# Altium PCB 400432.PcbDoc (part 5 of 7)
Units mm, origin at the board's own origin, x right, y up, seen from the top; angles counter-clockwise.
Board outline 136.53 x 63.5 mm, 4 copper layers (Top Layer, Mid-Layer 1, Mid-Layer 2, Bottom Layer), stack 1.505 mm thick; 354 components, 245 nets, 1470 pads, 1957 vias.
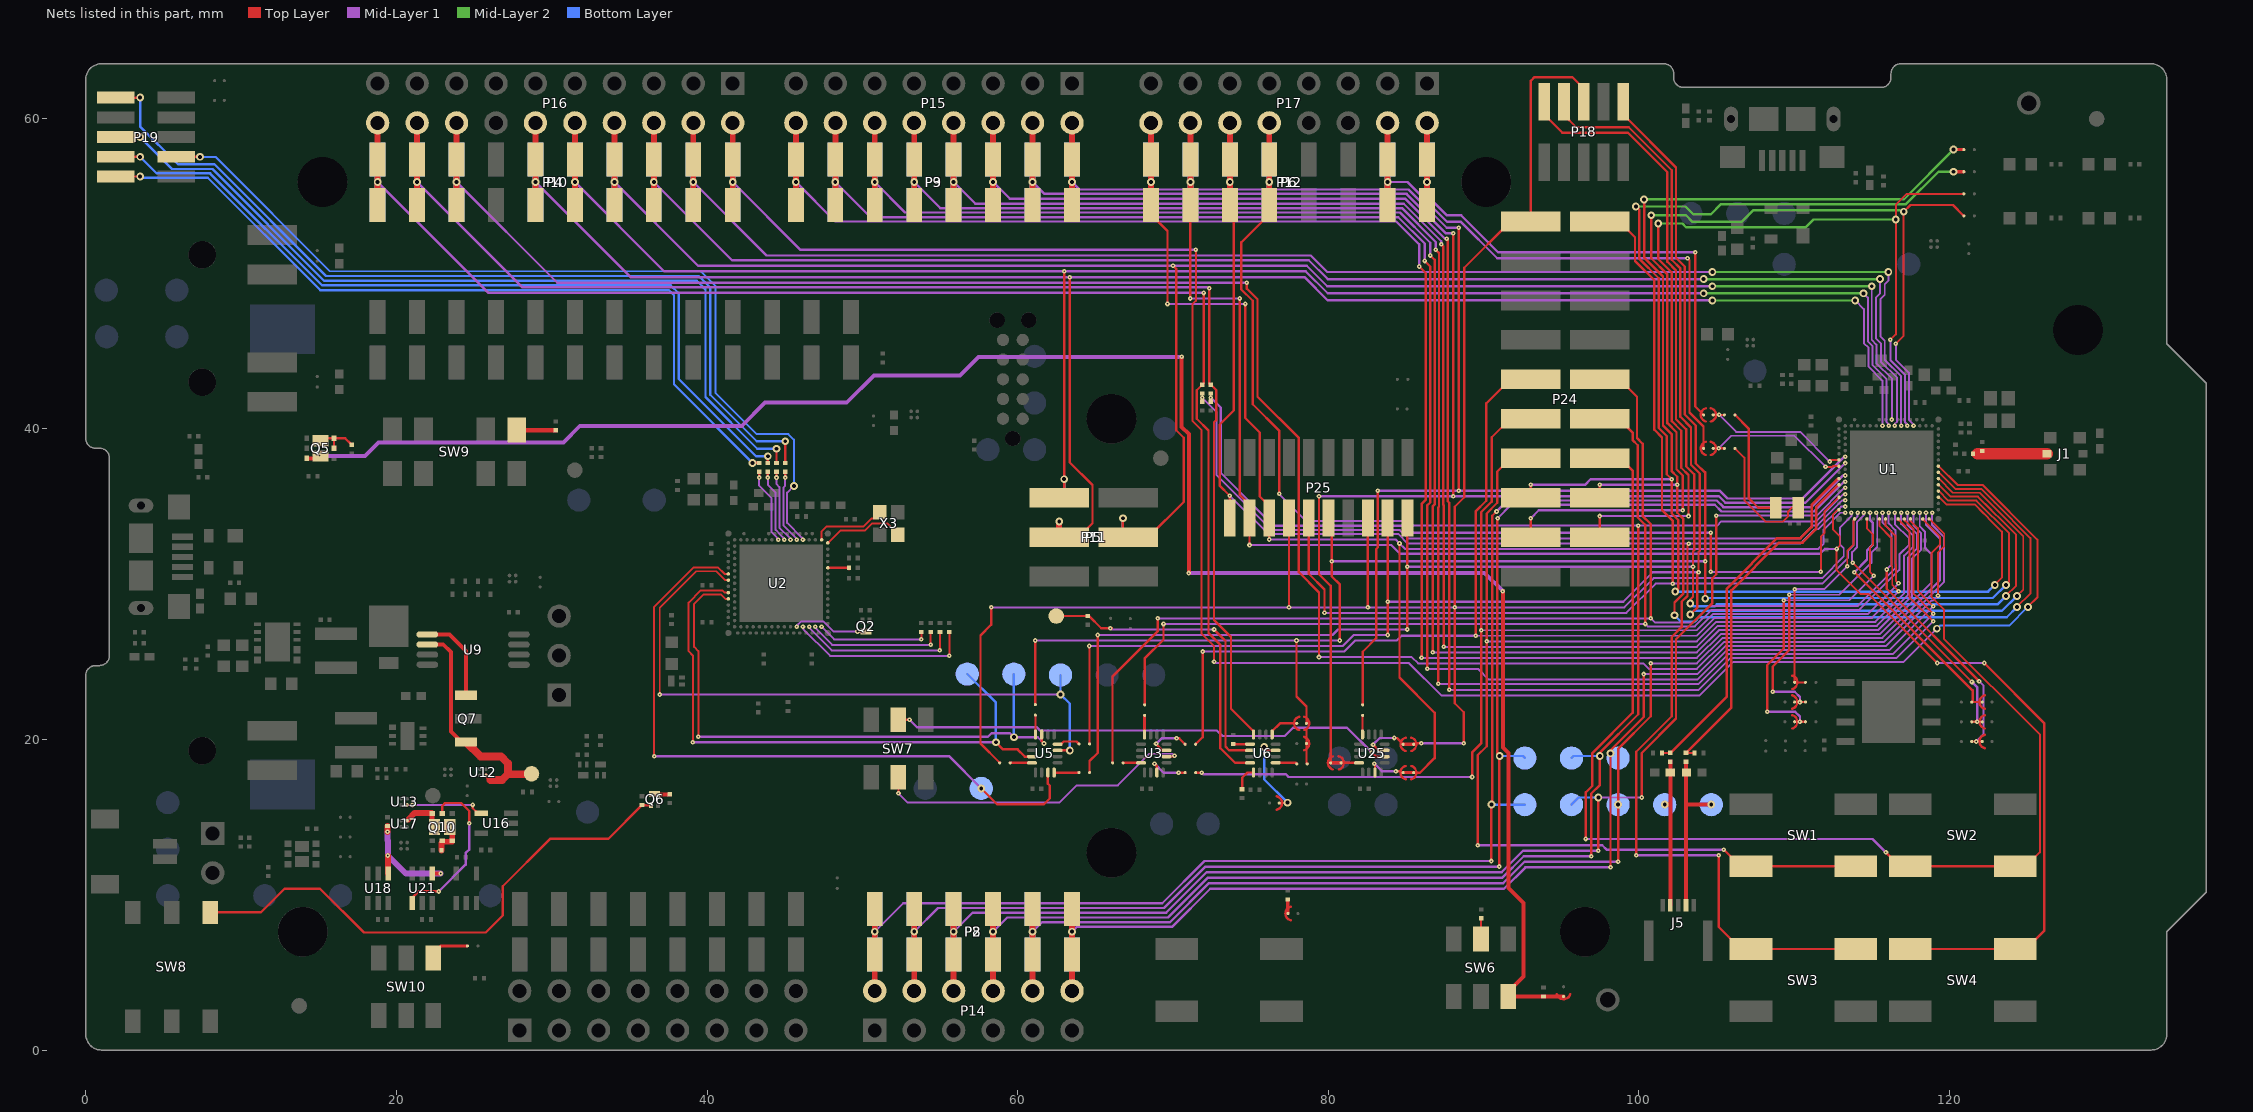
[diagram p6: the nets of this part, all layers, seen from the top]

## Via types
v1: diameter 0.5, hole 0.25, Top Layer to Bottom Layer, tented both sides, 1453 vias
v2: diameter 0.3, hole 0.1, Top Layer to Mid-Layer 1, tented top, 392 vias
v3: diameter 0.3, hole 0.1, Top Layer to Mid-Layer 1, tented both sides, 68 vias
v4: diameter 0.61, hole 0.305, Top Layer to Bottom Layer, tented both sides, 44 vias

## Nets (pads, with @x,y where several pads share a name; then routed paths per layer and width w, separated by ;. In a path a pad name is that pad's centre, name@x,y a point inside that pad or via, vN(x,y) a via of type N, cw(c..) or ccw(c..) an arc to the next point about the centre after c; other vN are vias at no path point) (continued)
NetQ5_3: Q5.3 R50.1 SB31.2 SW6.3 | length 124.5
  Top Layer w0.254: Q5.3@14.238,38.085 14.742,38.085 14.91,38.252 v2(15.062,38.252) ; v2(70.561,44.628) 70.561,40.107 71.018,39.649 v3(71.018,30.709) ; v3(91.237,29.54) 91.237,19.482 91.592,19.126 91.592,10.439 92.558,9.474 92.558,4.724 91.579,3.746 SW6.3@91.579,3.449 ; SW6.3@91.579,3.44 SW6.3@91.579,3.449 ; SB31.2@95.148,3.447 95.146,3.449 94.794,3.449 R50.1@93.853,3.449 SW6.3@91.579,3.449
  Mid-Layer 1 w0.254: v2(15.062,38.252) 17.983,38.252 18.847,39.116 30.759,39.116 31.833,40.189 42.247,40.189 43.739,41.681 48.997,41.681 50.749,43.434 56.286,43.434 57.48,44.628 v2(70.561,44.628) ; v3(71.018,30.709) 90.068,30.709 v3(91.237,29.54)
NetQ5_5: Q5.5 Q5.6 R51.2 | length 3
  Top Layer w0.152: Q5.6@15.113,39.21 15.288,39.385 Q5.6@15.988,39.385 Q5.6@16.058,39.385 ; Q5.5@16.063,38.735 15.988,38.81 15.988,39.31 16.063,39.385 16.704,39.385 17.046,39.043 17.046,39.028 17.105,38.969 R51.2@17.12,38.969
NetQ6_1: Q6.1 R61.1 SW8.4 | length 34.7
  Top Layer w0.152: SW8.4@8.028,8.859 11.272,8.859 12.802,10.389 15.088,10.389 17.907,7.569 25.756,7.569 26.851,8.664 26.851,10.544 29.901,13.595 33.641,13.595 R61.1@35.814,15.768 36.391,15.768 Q6.1@36.402,15.779
NetQ6_3: Q6.3 R58.2 | length 1
  Top Layer w0.254: Q6.3@36.627,16.479 36.641,16.465 R58.2@37.592,16.465
NetQ7_1: Q7.1 U9.1 | length 5.6
  Top Layer w0.254: U9.1@22.196,26.756 23.434,26.756 24.489,25.701 Q7.1@24.489,22.836
NetQ7_3: Q7.3 TP34.1 U9.2 U12.A1 | length 15
  Top Layer w0.25: U12.A1@25.778,17.682 26.065,17.394
  Top Layer w0.254: U9.2@22.196,26.106 23.018,26.106 23.51,25.614 23.51,20.509 24.182,19.836 Q7.3@24.489,19.836
  Top Layer w0.508: Q7.3@24.489,19.836 25.427,18.898 26.746,18.898 27.178,18.466 27.178,17.755 ; 26.065,17.394 26.818,17.394 27.178,17.755 ; TP34.1@28.651,17.856 28.55,17.755 27.178,17.755
NetQ10_2: Q10.2 U21.4 | length 10.6
  Top Layer w0.152: U21.4@21.016,9.464 21.016,9.789 21.438,10.211 v2(22.733,10.211) ; Q10.2@22.951,15.301 22.951,15.712 23.139,15.9 24.181,15.9 24.689,15.392 v2(24.689,14.605)
  Mid-Layer 1 w0.152: v2(22.733,10.211) 24.46,11.938 24.46,12.675 24.689,12.903 v2(24.689,14.605)
NetQ10_3: Q10.3 U17.A2 | length 2.7
  Top Layer w0.305: Q10.3@22.301,15.301 22.301,14.531 Q10.3@22.476,14.356
  Top Layer w0.381: U17.A2@20.764,14.846 21.184,15.265 Q10.3@22.265,15.265
NetQ10_5: Q10.5 Q10.6 R72.2 | length 2.2
  Top Layer w0.381: R72.2@22.916,12.852 22.916,13.315 23.012,13.411 23.601,13.411 Q10.6@23.601,13.481 23.601,14.181 Q10.6@23.426,14.356
NetR11_1: R11.1 U2.L31 | length 1.4
  Top Layer w0.152: U2.L31@47.776,31.048 49.055,31.048 R11.1@49.141,30.963
NetR44_2: R44.2 SW6.5 | length 1.3
  Top Layer w0.152: SW6.5@89.829,7.14 89.829,8.467 R44.2@89.84,8.478
NetR47_1: R47.1 SB26.2 | length 0.9
  Top Layer w0.203: SB26.2@77.386,8.788 77.386,9.639 R47.1@77.394,9.646
NetR48_2: R48.2 U6.9 | length 1.1
  Top Layer w0.152: R48.2@73.889,19.705 73.902,19.691 U6.9@74.96,19.691
NetR49_2: R49.2 U6.13 | length 1.6
  Top Layer w0.152: R49.2@74.447,16.846 74.447,17.526 74.788,17.866 U6.13@75.185,17.866
NetR57_1: R57.1 SB33.2 TP19.1 U6.10 | length 20.2
  Top Layer w0.152: TP19.1@62.484,27.94 R57.1@64.592,27.94 ; R57.1@64.516,27.946 64.587,27.946 R57.1@64.592,27.94 ; SB33.2@66.046,27.153 v2(65.97,27.153) 65.38,27.153 R57.1@64.592,27.94 ; v2@72.644,27.127 v2(72.644,27.076) 73.381,26.34 73.381,19.533 73.622,19.291 U6.10@74.96,19.291
  Mid-Layer 1 w0.152: v2@66.046,27.153 66.048,27.153 v2@66.073,27.127 ; v2@66.073,27.076 v2(72.644,27.076)
NetR71_2: R71.2 U18.1 U21.1 | length 7.5
  Top Layer w0.254: v2(19.456,12.522) v2@19.471,12.507 ; U21.1@22.316,11.364 v2(22.85,11.364)
  Top Layer w0.381: v2(19.431,14.046) R71.2@19.431,14.422 ; U18.1@19.471,11.364 v2@19.471,12.507
  Mid-Layer 1 w0.381: v2(19.431,14.046) 19.431,13.502 19.456,13.476 v2(19.456,12.522) 20.615,11.364 v2(22.85,11.364)
NetR78_2: R78.2 SW9.8 | length 2.5
  Top Layer w0.305: SW9.8@27.749,39.906 27.758,39.898 R78.2@30.251,39.898
NetSB1_1: SB1.1 X2.1 | length 7.7
  Top Layer w0.152: SB1.1@106.18,40.894 107.061,40.013 107.061,35.535 107.682,34.914 X2.1@108.803,34.914
NetSB2_1: SB2.1 X2.2 | length 8.2
  Top Layer w0.125: SB2.1@106.18,38.735 106.782,38.133 106.782,35.382 108.153,34.011 109.245,34.011 109.601,34.366 109.601,34.671 109.844,34.914 X2.2@110.253,34.914
NetSB27_2: SB27.2 U25.15 | length 2.7
  Top Layer w0.152: v3(82.956,18.44) 83.004,18.393 U25.15@83.004,17.866 ; v3(84.353,17.958) 84.645,17.958 84.655,17.948 84.747,17.856 SB27.2@84.82,17.856
  Mid-Layer 1 w0.152: v3(82.956,18.44) 83.439,17.958 v3(84.353,17.958)
NetSB28_2: SB28.2 U25.3 | length 3.2
  Top Layer w0.152: v3(82.88,19.66) 83.249,19.291 U25.3@83.629,19.291 ; v3(84.252,20.091) 84.414,20.091 84.671,19.834 SB28.2@84.82,19.685
  Mid-Layer 1 w0.152: v3(82.88,19.66) 83.312,20.091 v3(84.252,20.091)
NetSB29_2: SB29.2 U25.8 | length 1.2
  Top Layer w0.152: U25.8@82.204,20.316 82.204,21.542 SB29.2@82.211,21.549
NetSB30_2: SB30.2 U25.12 | length 1.2
  Top Layer w0.152: SB30.2@80.822,18.491 80.996,18.491 U25.12@81.979,18.491
NetSB42_1: SB42.1 U6.1 | length 1.4
  Top Layer w0.152: U6.1@76.61,18.491 77.801,18.491 77.903,18.491 SB42.1@77.97,18.423
NetSB45_1: SB45.1 U6.5 | length 2
  Top Layer w0.152: U6.5@76.385,20.316 76.385,20.531 76.886,21.031 77.796,21.031 SB45.1@77.97,21.031
NetSB46_1: SB46.1 U6.3 | length 5.6
  Top Layer w0.152: v1(75.87,19.507) 76.086,19.291 U6.3@76.61,19.291 ; SB46.1@76.843,15.9 77.343,15.9 v1(77.368,15.926)
  Bottom Layer w0.152: v1(75.87,19.507) 75.87,17.424 v1(77.368,15.926)
NetSB50_2: SB50.2 U3.15 | length 2.9
  Top Layer w0.152: v3(68.809,18.44) 68.966,18.283 U3.15@68.966,17.866 ; v3(70.358,17.856) SB50.2@70.782,17.856 SB50.2@70.772,17.866
  Mid-Layer 1 w0.152: v3(68.809,18.44) 69.393,17.856 v3(70.358,17.856)
NetSB51_2: SB51.2 U3.3 | length 3
  Top Layer w0.152: v3(68.91,19.71) 69.329,19.291 U3.3@69.591,19.291 ; v3(70.231,20.066) 70.401,20.066 SB51.2@70.782,19.685
  Mid-Layer 1 w0.152: v3(68.91,19.71) 69.266,20.066 v3(70.231,20.066)
NetSB52_2: SB52.2 U3.8 | length 1.2
  Top Layer w0.203: U3.8@68.166,20.316 SB52.2@68.166,21.506
NetSB53_2: SB53.2 U3.12 | length 1.2
  Top Layer w0.152: SB53.2@66.784,18.491 U3.12@67.941,18.491
NetSB54_2: SB54.2 U5.16 | length 1.6
  Top Layer w0.152: U5.16@62.347,17.866 62.357,17.856 SB54.2@63.95,17.856
NetSB55_2: SB55.2 U5.4 | length 1.5
  Top Layer w0.152: U5.4@62.572,19.691 62.795,19.691 62.967,19.863 63.797,19.863 SB55.2@63.95,19.71
NetSB56_2: SB56.2 U5.8 | length 1.2
  Top Layer w0.152: SB56.2@61.138,21.557 61.147,21.547 U5.8@61.147,20.316
NetSB57_2: SB57.2 U5.12 | length 1.4
  Top Layer w0.152: SB57.2@59.52,18.491 U5.12@60.922,18.491
NetSB58_2: SB58.2 SW10.1 | length 2.7
  Top Layer w0.203: SW10.1@22.375,5.914 22.375,6.195 22.885,6.706 SB58.2@24.58,6.706
NetU2_B30: U2.B30 X3.3 | length 4.6
  Top Layer w0.125: U2.B30@47.376,32.848 47.376,33.396 47.678,33.698 50.072,33.698 50.606,34.232 50.764,34.232 X3.3@51.011,34.48
NetU2_C31: U2.C31 X3.1 | length 5.3
  Top Layer w0.125: U2.C31@47.776,32.648 47.8,32.648 48.588,33.436 50.164,33.436 50.614,33.886 51.635,33.886 52.276,33.245 X3.1@52.276,33.178
NetU13_B2: U13.B2 U16.4 | length 5.1
  Top Layer w0.152: U13.B2@20.698,15.777 v2(21.034,15.777) ; v2(24.917,15.777) 24.917,15.57 25.233,15.255 U16.4@25.466,15.255
  Mid-Layer 1 w0.152: v2(21.034,15.777) v2(24.917,15.777)
NFC1: C43.1 J5.2 R43.1 TP17.1 | length 9.6
  Top Layer w0.25: v1(101.656,15.799) 101.973,15.799 102.024,15.748 ; J5.2@102.024,9.328 102.024,15.748 ; R43.1@102.022,18.563 102.024,15.748
NFC2: C44.2 J5.4 R46.1 TP18.1 | length 10.9
  Top Layer w0.25: J5.4@103.024,9.328 103.024,15.748 ; R46.1@103.024,18.567 103.024,15.748 ; v1(104.656,15.799) 103.075,15.799 103.024,15.748
P0.00: P6.1 P12.1 P17.2 SB3.2 | length 38.5
  Top Layer w0.152: v2(103.624,51.351) 103.624,41.427 104.009,41.043 SB3.2@104.158,40.894
  Top Layer w0.381: P6.1@86.36,54.415 v1(86.36,55.88) P6.1@86.36,57.345 P17.2@86.36,59.69
  Mid-Layer 1 w0.152: v1(86.36,55.88) 86.36,55.016 87.643,53.734 88.557,53.734 90.94,51.351 v2(103.624,51.351)
  Bottom Layer w0.381: P12.1@86.36,54.415 v1(86.36,55.88) P12.1@86.36,57.345
P0.00/XL1: SB1.2 SB3.1 U1.N1 | length 9.7
  Top Layer w0.125: SB3.1@104.783,40.894 104.957,40.894 v2(105.156,40.894) SB1.2@105.504,40.894 ; v2(112.293,37.887) 112.395,37.989 U1.N1@112.878,37.989
  Mid-Layer 1 w0.125: v2(105.156,40.894) 106.248,39.802 110.379,39.802 v2(112.293,37.887)
P0.01: P6.2 P12.2 P17.4 SB4.2 | length 42.2
  Top Layer w0.152: v2(103.124,50.978) 103.251,50.851 103.251,41.046 104.158,40.14 104.158,39.088 SB4.2@104.158,38.735
  Top Layer w0.381: P6.2@83.82,54.415 v1(83.82,55.88) P6.2@83.82,57.345 P17.4@83.82,59.69
  Mid-Layer 1 w0.152: v1(83.82,55.88) 85.09,55.88 87.655,53.315 88.544,53.315 90.881,50.978 v2(103.124,50.978)
  Bottom Layer w0.381: P12.2@83.82,54.415 v1(83.82,55.88) P12.2@83.82,57.345
P0.01/XL2: SB2.2 SB4.1 U1.R1 | length 9.7
  Top Layer w0.125: v2(112.014,37.541) 112.446,37.541 112.493,37.589 U1.R1@112.878,37.589
  Top Layer w0.152: SB4.1@104.783,38.735 104.957,38.735 v2(105.131,38.735) SB2.2@105.504,38.735
  Mid-Layer 1 w0.125: v2(105.131,38.735) 105.943,39.548 110.007,39.548 v2(112.014,37.541)
P0.02/NFC1: R42.2 R43.2 U1.W1 | length 23.6
  Top Layer w0.127: R42.2@101.479,19.126 R43.2@102.015,19.126
  Top Layer w0.165: R43.2@102.015,19.126 105.653,22.764 105.653,29.711 108.899,32.956 110.401,32.956 111.118,33.673 111.118,35.091 112.815,36.789 U1.W1@112.878,36.789
P0.03/NFC2: R45.2 R46.2 U1.AA1 | length 22.8
  Top Layer w0.152: R46.2@103.032,19.133 103.039,19.126 R45.2@103.576,19.126
  Top Layer w0.165: R46.2@103.032,19.133 105.943,22.045 105.943,29.591 109.019,32.666 110.543,32.666 111.408,33.531 111.408,34.971 112.825,36.389 U1.AA1@112.878,36.389
P0.04/AIN0: P2.1 P8.1 P14.2 TP42.1 U1.V2 | length 98.9
  Top Layer w0.152: v2(90.5,12.167) v1(90.5,15.799) 90.551,15.85 90.551,34.392 v2(90.83,34.671)
  Top Layer w0.381: P14.2@50.8,3.81 P2.1@50.8,6.155 v1(50.8,7.62) P2.1@50.8,9.085
  Mid-Layer 1 w0.152: v1(50.8,7.62) 52.629,9.449 69.303,9.449 72.021,12.167 v2(90.5,12.167) ; v2(90.83,34.671) 91.542,35.382 105.004,35.382 105.435,34.95 111.1,34.95 113.138,36.989 v2(113.278,36.989)
  Bottom Layer w0.152: v1(90.5,15.799) TP42.1@92.656,15.799
  Bottom Layer w0.381: P8.1@50.8,6.155 v1(50.8,7.62) P8.1@50.8,9.677
P0.05/AIN1: P2.2 P8.2 P14.4 TP43.1 U1.Y2 | length 95.5
  Top Layer w0.152: v2(90.907,34.239) 90.881,34.214 90.881,19.075 v1(91.031,18.926) ; v2(91.008,11.811) v1@91.008,18.903
  Top Layer w0.381: P14.4@53.34,3.81 P2.2@53.34,6.155 v1(53.34,7.62) P2.2@53.34,9.085
  Mid-Layer 1 w0.152: v1(53.34,7.62) 54.864,9.144 69.429,9.144 72.096,11.811 v2(91.008,11.811) ; v2@90.83,34.239 v2(90.907,34.239) 91.77,35.103 104.877,35.103 105.308,34.671 111.277,34.671 113.195,36.589 v2(113.278,36.589)
  Bottom Layer w0.152: v1(91.031,18.926) 92.529,18.926 TP43.1@92.656,18.799
  Bottom Layer w0.381: P8.2@53.34,6.155 v1(53.34,7.62) P8.2@53.34,9.085
P0.06/AIN2: P2.3 P8.3 P14.6 TP44.1 U1.AB2 | length 89.2
  Top Layer w0.152: v2(97.384,12.827) v1(97.384,16.256) ; v2(100.178,16.256) 100.178,19.126 102.387,21.336 102.387,26.441 104.724,28.778 104.724,30.378 104.978,30.632 v2(104.978,34.392)
  Top Layer w0.381: P14.6@55.88,3.81 P2.3@55.88,6.155 v1(55.88,7.62) P2.3@55.88,9.085
  Mid-Layer 1 w0.125: v2@104.978,34.403 111.441,34.403 113.227,36.189 v2(113.278,36.189)
  Mid-Layer 1 w0.152: v1(55.88,7.62) 57.099,8.839 69.555,8.839 72.172,11.455 91.161,11.455 92.532,12.827 v2(97.384,12.827) ; v1(97.384,16.256) v2(100.178,16.256)
  Bottom Layer w0.152: TP44.1@95.656,15.799 96.114,16.256 v1(97.384,16.256)
  Bottom Layer w0.381: P8.3@55.88,6.155 v1(55.88,7.62) P8.3@55.88,9.085
P0.07/AIN3: P2.4 P6.5 P8.4 P12.5 P14.8 P17.10 TP45.1 U1.AD2 | length 140.3
  Top Layer w0.152: P6.5@76.2,54.61 P6.5@76.2,54.415 76.2,53.797 74.397,51.994 74.397,48.971 75.133,48.235 75.133,41.58 76.835,39.878 v2(76.835,35.814) ; v2(96.926,12.471) 96.926,16.51 97.482,17.066 97.482,18.9 v1@97.508,18.926 ; v1@97.447,18.986 97.482,19.022 97.482,19.149 99.949,21.615 v2(99.949,33.757)
  Top Layer w0.381: P14.8@58.42,3.81 P2.4@58.42,6.155 v1(58.42,7.62) P2.4@58.42,9.085 ; P6.5@76.2,54.61 v1(76.2,55.88) P6.5@76.2,57.345 P17.10@76.2,59.69
  Mid-Layer 1 w0.125: v2(76.835,35.814) 76.835,35.789 78.562,34.061 84.861,34.061 85.166,33.757 v2(99.949,33.757) 105.029,33.757 105.308,34.036 111.401,34.036 v2@113.154,35.789
  Mid-Layer 1 w0.152: v1(58.42,7.62) 59.334,8.534 69.682,8.534 72.247,11.1 91.211,11.1 92.583,12.471 v2(96.926,12.471)
  Bottom Layer w0.152: TP45.1@95.656,18.799 95.783,18.926 v1(97.482,18.926) v1@97.508,18.926
  Bottom Layer w0.381: P8.4@58.42,6.155 v1(58.42,7.62) P8.4@58.42,9.652 ; P12.5@76.2,54.415 v1(76.2,55.88) P12.5@76.2,57.345
  other v2: 113.278,35.789
P0.08/TRACEDATA3: P6.6 P12.6 P17.12 P25.20 SW3.2 U1.AH2 | length 111.8
  Top Layer w0.152: P25.20@73.66,34.245 v2(73.66,35.687) 73,36.347 73,40.259 73.914,41.173 73.914,54.458 P6.6@73.66,54.712 ; v2(99.822,12.548) 99.822,19.202 102.108,21.488 102.108,26.594 102.743,27.229 102.743,28.854 103.124,29.235 103.124,32.527 v2(103.2,32.604) ; v2(105.131,12.548) 105.131,7.925 106.554,6.502 SW3.2@107.206,6.502 SW3.2@113.956,6.502
  Top Layer w0.381: P6.6@73.66,54.712 v1(73.66,55.88) P6.6@73.66,57.345 P17.12@73.66,59.69
  Mid-Layer 1 w0.125: v2(73.66,35.687) 76.124,33.223 84.506,33.223 85.125,32.604 v2(103.2,32.604) 110.378,32.604 111.303,33.528 111.557,33.528 113.018,34.989 v2(113.278,34.989)
  Mid-Layer 1 w0.152: v2(99.822,12.548) v2(105.131,12.548)
  Bottom Layer w0.381: P12.6@73.66,54.415 v1(73.66,55.88) P12.6@73.66,57.345
P0.09/TRACEDATA2: P6.7 P12.7 P17.14 P25.18 SW4.2 U1.AJ1 | length 116
  Top Layer w0.125: v2@74.93,32.563 P25.18@74.93,34.245 ; U1.AJ1@112.878,34.789 112.796,34.789 112.478,34.471 112.478,33.539 112.928,33.088 112.928,32.461 v2(112.725,32.258) 112.725,30.886 114.249,29.362 114.757,29.362 v2(119.202,24.917)
  Top Layer w0.152: v2(71.12,48.387) P6.7@71.12,54.415 ; v2(74.295,48.387) 74.295,35.738 74.93,35.103 P25.18@74.93,34.245 ; SW4.2@117.467,6.502 SW4.2@124.217,6.502 124.916,6.502 126.086,7.671 126.086,21.057 v2(122.225,24.917)
  Top Layer w0.381: P6.7@71.12,54.415 v1(71.12,55.88) P6.7@71.12,57.345 P17.14@71.12,59.69
  Mid-Layer 1 w0.125: v2(119.202,24.917) v2(122.225,24.917)
  Mid-Layer 1 w0.152: v2(71.12,48.387) v2(74.295,48.387) ; v2(74.93,32.512) 84.049,32.512 84.607,31.953 111.658,31.953 111.963,32.258 v2(112.725,32.258)
  Bottom Layer w0.381: P12.7@71.12,54.415 v1(71.12,55.88) P12.7@71.12,57.345
P0.10/TRACEDATA1: P6.8 P12.8 P17.16 P25.16 SB27.1 U1.AK2 | length 91.2
  Top Layer w0.152: P6.8@68.58,54.415 68.58,53.797 69.647,52.73 v2(69.647,48.031) ; v2(74.651,48.031) 74.651,40.691 75.59,39.751 75.59,35.636 76.2,35.027 P25.16@76.2,34.245 v2(76.2,32.868) ; v2(84.582,32.614) 84.582,23.978 86.843,21.717 86.843,18.796 85.903,17.856 SB27.1@85.496,17.856
  Top Layer w0.381: P6.8@68.58,54.415 v1(68.58,55.88) P6.8@68.58,57.345 P17.16@68.58,59.69
  Mid-Layer 1 w0.125: v2(76.2,32.868) 84.328,32.868 v2(84.582,32.614) 84.938,32.258 111.557,32.258 111.887,32.588 111.887,33.503 112.973,34.589 v2(113.278,34.589)
  Mid-Layer 1 w0.152: v2(69.647,48.031) v2(74.651,48.031)
  Bottom Layer w0.381: P12.8@68.58,54.415 v1(68.58,55.88) P12.8@68.58,57.345
P0.11/TRACEDATA0: P18.6 P24.1 P25.6 P25.14 SB28.1 SB57.1 U1.AK4 | length 136.6
  Top Layer w0.152: v3(58.293,28.499) 58.293,27.381 57.607,26.695 57.607,19.728 SB57.1@58.844,18.491 ; v3(77.47,28.499) P25.14@77.47,34.245 ; v2(82.55,28.499) P25.6@82.55,34.245 ; SB28.1@85.496,19.685 85.572,19.761 v2(85.979,19.761) ; v2(88.722,19.761) 88.722,21.742 88.138,22.327 v2(88.138,28.499) 88.138,34.976 88.748,35.585 88.748,50.368 91.719,53.34 P24.1@94.285,53.34 ; P24.1@93.027,53.34 93.027,62.395 93.269,62.636 95.707,62.636 96.444,61.9 P18.6@96.444,61.056
  Mid-Layer 1 w0.125: v3(58.293,28.499) v3(77.47,28.499) v2(82.55,28.499) v2(88.138,28.499) 99.06,28.499 100.94,30.378 111.785,30.378 113.182,31.775 113.182,32.309 112.928,32.563 112.928,33.63 113.678,34.379 v2(113.678,34.589)
  Mid-Layer 1 w0.152: v2(85.979,19.761) v2(88.722,19.761)
P0.12/TRACECLK: P24.2 P25.12 U1.AK6 | length 70.8
  Top Layer w0.152: P25.12@78.74,34.245 78.74,30.658 79.756,29.642 v2(79.756,28.143) ; P24.2@97.472,53.34 98.73,53.34 99.746,52.324 99.746,50.8 100.99,49.555 100.99,39.929 101.479,39.44 101.479,34.766 102.184,34.061 v2@102.184,30.074
  Mid-Layer 1 w0.125: v2(79.756,28.143) 99.187,28.143 101.067,30.023 v2(102.184,30.023) 111.785,30.023 113.462,31.699 113.462,32.156 113.817,32.512 113.817,34.106 114.078,34.366 v2(114.078,34.589)
P0.13/QSPI0: SB12.1 SB22.1 U1.AL5 | length 13.7
  Top Layer w0.125: SB22.1@110.023,23.673 110.023,24.026 110.023,29.657 v2(110.033,29.667) ; 110.197,23.673 SB12.1@110.642,23.673 ; v2(113.411,31.14) 113.411,32.156 113.817,32.563 113.817,34.128 U1.AL5@113.878,34.189
  Mid-Layer 1 w0.125: v2(110.033,29.667) 111.938,29.667 v2(113.411,31.14)
P0.14/QSPI1: SB14.1 SB24.1 U1.AK8 | length 17.8
  Top Layer w0.125: v2(113.767,31.369) v2(121.437,23.698)
  Top Layer w0.152: SB14.1@121.478,21.133 v2(121.768,21.133) SB24.1@122.098,21.133
  Mid-Layer 1 w0.125: v2(113.767,31.369) 113.716,31.42 113.716,32.055 114.046,32.385 114.046,34.011 114.478,34.442 v2(114.478,34.589) v2@114.415,34.526
  Mid-Layer 1 w0.152: v2(121.437,23.698) 121.768,23.368 v2(121.768,21.133)
P0.15/QSPI2: SB15.1 SB25.1 U1.AK10 | length 16.5
  Top Layer w0.152: v2(113.868,30.765) 121.478,23.155 121.478,22.403 121.923,22.403 SB25.1@122.098,22.403
  Mid-Layer 1 w0.152: v2(113.868,30.765) 114.681,31.578 114.681,32.157 115.062,32.537 115.062,33.935 114.878,34.119 v2(114.878,34.589)
P0.16/QSPI3: SB10.1 SB20.1 U1.AL9 | length 21.2
  Top Layer w0.125: U1.AL9@114.678,34.189 114.678,33.582 115.062,33.198 115.062,32.537 114.884,32.36 114.884,30.76 v2(115.113,30.531)
  Top Layer w0.152: v2(108.255,21.768) 108.255,24.79 109.322,25.857 v2(109.322,28.956) ; SB20.1@110.023,21.133 110.197,21.133 v2(110.363,21.133) SB10.1@110.642,21.133
  Mid-Layer 1 w0.125: v2(109.322,28.956) 113.538,28.956 v2(115.113,30.531)
  Mid-Layer 1 w0.152: v2(108.255,21.768) 110.058,21.768 110.363,21.463 v2(110.363,21.133)
P0.17/QSPI_CLK: SB11.1 SB21.1 U1.AK12 | length 19.1
  Top Layer w0.152: v2(108.61,23.063) 108.61,24.689 109.677,25.756 v2(109.677,29.312) v2@109.677,29.362 ; SB21.1@110.023,22.403 110.197,22.403 v2(110.363,22.403) SB11.1@110.642,22.403
  Mid-Layer 1 w0.125: v2(109.677,29.312) 112.903,29.312 114.96,31.369 114.96,32.004 115.341,32.385 115.341,34.525 v2(115.278,34.589)
  Mid-Layer 1 w0.152: v2(108.61,23.063) 110.033,23.063 110.363,22.733 v2(110.363,22.403)
P0.18/QSPI_CS: SB13.1 SB23.1 U1.AK14 | length 18.5
  Top Layer w0.125: SB13.1@121.478,19.863 v2(121.717,19.863) 121.923,19.863 SB23.1@122.098,19.863
  Top Layer w0.152: v2(115.951,30.937) 115.951,29.693 v2(121.895,23.749)
  Mid-Layer 1 w0.125: v2(115.678,34.589) 115.678,33.979 116.256,33.401 116.256,31.242 v2(115.951,30.937) ; v2(121.717,19.863) 122.174,20.32 122.174,23.47 v2(121.895,23.749)
P0.19: P24.9 SB51.1 U1.AL13 | length 76.6
  Top Layer w0.125: U1.AL13@115.478,34.189 115.478,33.739 116.253,32.964 116.253,31.191 116.307,31.137 116.307,29.947 v2(116.713,29.54)
  Top Layer w0.152: SB51.1@71.458,19.685 71.907,20.135 v2(71.907,25.654) v2@71.907,25.705 ; v2(89.484,26.67) 89.484,34.671 90.17,35.357 90.17,41.631 91.719,43.18 P24.9@93.027,43.18
  Mid-Layer 1 w0.125: v2(89.484,26.67) 103.734,26.67 104.891,27.827 115,27.827 v2(116.713,29.54) v2@116.713,29.566
  Mid-Layer 1 w0.152: v2(71.907,25.654) 81.026,25.654 81.737,26.365 84.404,26.365 84.709,26.67 v2(89.484,26.67)
P0.20: P24.10 SB53.1 U1.AK16 | length 80.8
  Top Layer w0.152: SB53.1@66.109,18.491 66.109,24.046 69.012,26.949 v2(69.012,27.788) ; P24.10@97.472,43.18 98.755,43.18 99.873,42.062 99.873,39.395 100.235,39.033 100.235,34.385 100.762,33.858 v2(100.762,27.788)
  Mid-Layer 1 w0.125: v2(69.012,27.788) v2(100.762,27.788) 101.016,27.534 103.48,27.534 104.546,28.6 114.097,28.6 116.51,31.013 116.51,33.477 116.078,33.909 v2(116.078,34.589)
P0.21: P24.11 SB50.1 U1.AL15 | length 75.9
  Top Layer w0.125: U1.AL15@115.878,34.189 115.878,33.739 116.503,33.114 116.503,31.344 116.561,31.286 116.561,30.194 v2(116.71,30.045)
  Top Layer w0.152: SB50.1@71.458,17.856 v2(71.857,17.856) ; v2(89.256,17.577) 89.256,19.152 89.84,19.736 v2(89.84,27.026) 89.84,34.62 90.526,35.306 90.526,39.446 91.719,40.64 P24.11@93.027,40.64
  Mid-Layer 1 w0.125: v2(89.84,27.026) 103.734,27.026 104.793,28.085 114.75,28.085 v2(116.71,30.045)
  Mid-Layer 1 w0.152: v2(71.857,17.856) 71.958,17.755 77.267,17.755 77.445,17.577 v2(89.256,17.577)
P0.22: P24.12 SB52.1 U1.AK18 | length 74.1
  Top Layer w0.152: SB52.1@68.174,22.225 68.174,25.197 69.393,26.416 v2(69.393,27.432) ; P24.12@97.472,40.64 98.704,40.64 99.593,39.751 99.593,39.268 99.924,38.938 99.924,34.29 100.406,33.807 v2@100.406,27.483
  Mid-Layer 1 w0.125: v2(69.393,27.432) v2(100.406,27.432) 100.559,27.28 103.607,27.28 104.673,28.346 ; 104.673,28.343 114.195,28.343 116.764,30.912 116.764,31.902 117.399,32.537 117.399,32.944 116.478,33.865 v2(116.478,34.589)
P0.23: P24.13 SW1.2 U1.AK20 | length 86.6
  Top Layer w0.152: v2(89.611,13.183) 89.611,18.974 90.195,19.558 v2(90.195,26.314) 90.195,34.544 90.881,35.23 90.881,37.236 91.745,38.1 P24.13@93.027,38.1 ; v2(105.461,12.903) 106.534,11.83 SW1.2@107.206,11.83 SW1.2@113.956,11.83 SW1.2@114.635,11.83
  Mid-Layer 1 w0.125: v2(90.195,26.314) 103.734,26.314 104.989,27.57 115.225,27.57 117.069,29.413 117.069,31.826 117.653,32.41 117.653,33.096 116.878,33.871 v2(116.878,34.589)
  Mid-Layer 1 w0.152: v2(89.611,13.183) 97.638,13.183 97.917,12.903 v2(105.461,12.903)
P0.24: P24.14 SW2.2 U1.AL27 | length 82.8
  Top Layer w0.125: U1.AL27@118.278,34.165 119.378,33.065 119.378,32.535 118.847,32.004 118.847,29.159 119.634,28.372 119.634,26.492 125.806,20.32 125.806,12.725 124.911,11.83 SW2.2@124.217,11.83
  Top Layer w0.15: U1.AL27@118.278,34.147 118.278,34.165 U1.AL27@118.278,34.189
  Top Layer w0.152: v2(96.571,13.589) 96.571,16.586 97.003,17.018 97.003,19.126 99.593,21.717 99.593,37.313 98.806,38.1 P24.14@97.472,38.1 ; v2(115.9,12.725) 116.796,11.83 SW2.2@117.467,11.83 SW2.2@124.217,11.83
  Mid-Layer 1 w0.152: v2@96.571,13.589 98.882,13.589 115.037,13.589 v2(115.9,12.725)
P0.25/AIN4: P2.5 P8.5 P14.10 TP46.1 U1.AK28 | length 87.5
  Top Layer w0.152: v2@98.656,12.116 v1(98.656,15.799) 98.656,19.383 100.762,21.488 v2(100.762,24.892)
  Top Layer w0.381: P14.10@60.96,3.81 P2.5@60.96,6.155 v1(60.96,7.62) P2.5@60.96,9.085
  Mid-Layer 1 w0.125: v2(100.762,24.892) 103.734,24.892 105.381,26.539 115.668,26.539 119.38,30.251 119.38,32.918 118.478,33.821 v2(118.478,34.589)
  Mid-Layer 1 w0.152: v1(60.96,7.62) 61.57,8.23 69.808,8.23 72.323,10.744 91.262,10.744 92.634,12.116 v2(98.654,12.116)
  Bottom Layer w0.381: P8.5@60.96,6.155 v1(60.96,7.62) P8.5@60.96,9.652
P0.26/AIN5: P2.6 P8.6 P14.12 TP47.1 U1.AL29 | length 84.5
  Top Layer w0.125: U1.AL29@118.678,34.165 118.73,34.165 119.653,33.242 119.653,32.436 119.253,32.036 v2(119.253,29.254)
  Top Layer w0.152: v2(98.171,11.76) v1(98.171,19.101) 98.171,19.304 100.305,21.438 v2(100.305,24.206)
  Top Layer w0.381: P14.12@63.5,3.81 P2.6@63.5,6.155 v1(63.5,7.62) P2.6@63.5,9.085
  Mid-Layer 1 w0.125: v2(100.305,24.206) 103.759,24.206 105.577,26.024 115.915,26.024 118.821,28.931 118.929,28.931 v2(119.253,29.254) ; v2@119.228,29.331 v2@119.228,29.337
  Mid-Layer 1 w0.152: v1(63.5,7.62) 63.805,7.925 69.934,7.925 72.398,10.389 91.313,10.389 92.685,11.76 v2(98.171,11.76)
  Bottom Layer w0.381: P8.6@63.5,6.155 v1(63.5,7.62) P8.6@63.5,9.085
P0.27/AIN6: P4.8 P10.8 P16.16 U1.AK30 | length 136.5
  Top Layer w0.152: P4.8@23.876,53.848 P4.8@23.876,54.415 ; v2(74.752,49.403) 74.752,49.022 75.438,48.336 75.438,42.062 78.105,39.395 78.105,30.759 79.4,29.464 v2@79.4,25.349
  Top Layer w0.381: P4.8@23.876,54.415 v1(23.876,55.88) P4.8@23.876,57.345 P16.16@23.876,59.69
  Mid-Layer 1 w0.125: v2(79.4,25.298) 85.369,25.298 85.776,24.892 100.279,24.892 100.635,24.536 103.734,24.536 105.479,26.282 115.791,26.282 119.634,30.124 119.634,33.045 118.878,33.802 v2(118.878,34.589)
  Mid-Layer 1 w0.152: v1(23.876,55.88) 30.353,49.403 v2(74.752,49.403)
  Bottom Layer w0.381: P10.8@23.876,53.848 v1(23.876,55.88) P10.8@23.876,57.345
P0.28/AIN7: P24.15 SB5.1 U1.AE31 | length 90.5
  Top Layer w0.125: U1.AE31@119.278,35.589 119.334,35.589 119.797,35.126 ; 122.203,34.539 121.615,35.126 ; v1(122.911,29.947) 123.368,30.404 123.368,33.374 121.615,35.126 ; 119.797,35.126 121.615,35.126 ; 119.797,35.126 121.615,35.126
  Top Layer w0.152: P24.15@93.027,35.56 v2(93.027,36.385) ; v1(99.797,54.305) 100.025,54.077 100.025,50.927 101.27,49.682 101.27,40.056 101.79,39.535 101.79,37.071 v2(102.108,36.754) 102.108,34.544 102.54,34.112 102.54,29.718 v1(102.337,29.515)
  Top Layer w0.203: v1(120.25,56.547) SB5.1@120.913,56.547
  Mid-Layer 1 w0.152: v2(93.027,36.385) 96.533,36.385 96.901,36.754 v2(102.108,36.754)
  Mid-Layer 2 w0.152: v1@99.898,54.305 102.997,54.305 103.505,53.797 104.623,53.797 105.283,54.458 117.196,54.458 119.285,56.547 v1(120.25,56.547)
  Bottom Layer w0.152: v1(102.337,29.515) 122.479,29.515 v1(122.911,29.947)
P0.29: P24.16 SB6.1 U1.U31 | length 90.8
  Top Layer w0.125: U1.U31@119.29,37.201 120.364,36.126 122.029,36.126 122.903,35.253 125.197,32.959 125.197,29.388 v1(124.333,28.524)
  Top Layer w0.152: P24.16@97.472,35.56 v2(97.472,36.385) ; v1(100.33,54.762) 100.33,51.029 101.549,49.809 101.549,40.208 102.102,39.656 102.102,37.268 102.464,36.906 v2(102.464,36.385) 102.464,34.595 102.845,34.214 102.845,29.362 102.286,28.804 v1(102.286,27.991)
  Top Layer w0.203: v1(120.25,57.97) SB6.1@120.913,57.97
  Mid-Layer 1 w0.152: v2(97.472,36.385) v2(102.464,36.385)
  Mid-Layer 2 w0.152: v1(100.33,54.762) 117.043,54.762 v1(120.25,57.97)
  Bottom Layer w0.152: v1(102.286,27.991) 102.692,27.584 103.607,27.584 103.886,27.864 123.673,27.864 v1(124.333,28.524)
P0.30: P24.17 SB7.1 U1.B24 | length 66.7
  Top Layer w0.125: v2(116.535,45.466) 117.043,45.974 v1(117.043,53.972)
  Top Layer w0.152: P24.17@93.027,33.02 v2(93.027,34.227) ; v1(100.787,53.746) 100.787,50.978 101.829,49.936 101.829,40.361 102.413,39.776 102.413,37.389 102.819,36.982 v2(102.819,34.747) ; v1(117.043,53.972) 117.478,54.407 120.209,54.407 SB7.1@120.913,53.702
  Mid-Layer 1 w0.125: v2(116.535,45.466) 116.535,44.45 117.378,43.608 117.378,40.566 117.678,40.266 v2(117.678,40.189)
  Mid-Layer 1 w0.152: v2(93.027,34.227) 93.548,34.747 v2(102.819,34.747)
  Mid-Layer 2 w0.152: v1(100.787,53.746) 103.022,53.746 103.454,53.315 106.604,53.315 107.366,54.077 116.939,54.077 v1(117.043,53.972)
P0.31: P24.18 SB8.1 U1.B22 | length 62
  Top Layer w0.125: v2(116.18,45.72) 116.535,46.076 v1(116.535,53.467) 116.535,54.407 117.253,55.125 SB8.1@120.913,55.125
  Top Layer w0.152: P24.18@97.472,33.02 v2(97.472,34.379) ; v1(101.244,53.213) 101.244,50.927 102.108,50.063 102.108,40.488 102.724,39.872 102.724,37.484 103.187,37.021 v2(103.187,34.379)
  Mid-Layer 1 w0.125: v2(116.18,45.72) 116.18,44.425 117.128,43.477 117.128,40.416 ; v2(117.278,40.189) v2@117.278,40.266 ; 117.128,40.416 v2@117.278,40.266 ; 117.128,40.416 v2@117.278,40.266
  Mid-Layer 1 w0.152: v2(97.472,34.379) v2(103.187,34.379)
  Mid-Layer 2 w0.152: v1(101.244,53.213) 102.794,53.213 103.048,52.959 110.719,52.959 111.227,53.467 v1(116.535,53.467)
P1.00: P3.1 P9.1 P15.2 SB29.1 U1.M2 | length 99.7
  Top Layer w0.152: SB29.1@82.211,22.225 82.211,25.646 83.083,26.518 83.083,32.258 83.185,32.36 v3(83.185,36.017) ; v2(88.392,36.017) v2(88.392,52.934)
  Top Layer w0.381: P3.1@63.5,54.415 v1(63.5,55.88) P3.1@63.5,57.345 P15.2@63.5,59.69
  Mid-Layer 1 w0.152: v1(63.5,55.88) 63.983,55.397 85.166,55.397 87.63,52.934 v2(88.392,52.934) ; v3(83.185,36.017) v2(88.392,36.017) 105.181,36.017 105.689,35.509 110.521,35.509 v2@113.2,38.189 ; 111.688,36.676 v2@113.2,38.189 ; v2@113.2,38.189 v2(113.278,38.189) v2@113.2,38.189
  Bottom Layer w0.381: P9.1@63.5,53.807 v1(63.5,55.88) P9.1@63.5,57.345
P1.01: P3.2 P9.2 P15.4 SB30.1 U1.P2 | length 108.7
  Top Layer w0.152: P3.2@60.96,53.797 P3.2@60.96,54.415 ; v3(79.4,35.662) 79.4,30.632 80.146,29.886 SB30.1@80.146,18.491 ; v2(88.036,35.662) v2(88.036,52.578)
  Top Layer w0.381: P3.2@60.96,54.415 v1(60.96,55.88) P3.2@60.96,57.345 P15.4@60.96,59.69
  Mid-Layer 1 w0.152: v1(60.96,55.88) 61.722,55.118 85.039,55.118 87.579,52.578 v2(88.036,52.578) ; v3(79.4,35.662) v2(88.036,35.662) 105.131,35.662 105.562,35.23 110.719,35.23 v2(113.278,37.789) 111.915,36.426
  Bottom Layer w0.381: P9.2@60.96,54.415 v1(60.96,55.88) P9.2@60.96,57.345
P1.02: P4.9 P10.9 P16.18 R20.1 U6.8 | length 92.7
  Top Layer w0.152: P4.9@21.336,53.823 P4.9@21.336,54.415 ; R20.1@72.339,42.906 v2(72.339,49.047) ; R20.1@72.365,42.906 R20.1@72.441,42.83 72.796,42.474 72.796,40.564 72.644,40.411 72.644,37.236 72.644,27.686 73.736,26.594 73.736,21.971 75.185,20.522 U6.8@75.185,20.316 ; v2@72.365,49.047 v2@72.365,49.098
  Top Layer w0.381: P4.9@21.336,54.415 v1(21.336,55.88) P4.9@21.336,57.345 P16.18@21.336,59.69
  Mid-Layer 1 w0.152: v1(21.336,55.88) 28.115,49.101 64.793,49.101 64.795,49.098 72.314,49.098 v2@72.365,49.047
  Bottom Layer w0.381: P10.9@21.336,54.415 v1(21.336,55.88) P10.9@21.336,57.345
P1.02/I2C: C29.2 R20.2 U1.AE1 | length 53.2
  Top Layer w0.125: v2(111.709,30.785) 111.709,33.045 111.953,33.289 111.953,34.688 112.853,35.589 U1.AE1@112.878,35.589
  Top Layer w0.152: v2(104.623,30.785) v2(104.623,33.299)
  Mid-Layer 1 w0.125: v2(104.623,30.785) v2(111.709,30.785)
  Mid-Layer 1 w0.152: v2(72.441,41.999) 73.076,41.364 73.076,37.16 76.479,33.757 84.734,33.757 85.192,33.299 v2(104.623,33.299)
P1.03: P4.10 P10.10 P16.20 R24.1 U6.12 | length 96.8
  Top Layer w0.152: v2(71.984,48.743) 71.984,42.932 R24.1@71.882,42.83 71.526,42.474 71.526,40.64 72.288,39.878 72.288,26.848 73.05,26.086 73.05,19.431 73.99,18.491 U6.12@74.96,18.491
  Top Layer w0.381: P4.10@18.796,54.415 v1(18.796,55.88) P4.10@18.796,57.345 P16.20@18.796,59.69
  Mid-Layer 1 w0.152: v1(18.796,55.88) 25.933,48.743 v2@71.958,48.743
  Bottom Layer w0.381: P10.10@18.796,54.415 v1(18.796,55.88) P10.10@18.796,57.345
P1.03/I2C: C28.2 R24.2 U1.AF2 | length 48.7
  Mid-Layer 1 w0.125: v2(71.882,41.999) 72.796,41.085 72.796,37.033 76.352,33.477 84.607,33.477 85.141,32.944 110.363,32.944 111.201,33.782 111.481,33.782 113.087,35.389 ; 113.087,35.389 v2(113.278,35.389) 113.087,35.389
P1.04: P3.3 P9.3 P15.6 U1.AL19 | length 109.5
  Top Layer w0.125: U1.AL19@116.678,34.147 116.695,34.147 116.878,33.963 117.428,33.414 117.428,29.13 v2(118.948,27.61) ; U1.AL19@116.678,34.165 116.878,33.964
  Top Layer w0.15: U1.AL19@116.678,34.147 U1.AL19@116.678,34.189
  Top Layer w0.152: P3.3@58.42,53.823 P3.3@58.42,54.415 ; v2(87.63,52.222) v2@87.63,52.172 ; v2@87.681,52.222 v2@87.63,52.172 ; v2(87.782,23.19) 87.782,35.23 87.681,35.331 87.681,52.121 v2@87.63,52.172
  Top Layer w0.381: P3.3@58.42,54.415 v1(58.42,55.88) P3.3@58.42,57.345 P15.6@58.42,59.69
  Mid-Layer 1 w0.125: v2@87.782,23.19 103.835,23.19 105.896,25.251 116.59,25.251 v2(118.948,27.61)
  Mid-Layer 1 w0.152: v1(58.42,55.88) 59.487,54.813 84.938,54.813 87.528,52.222 v2(87.63,52.222)
  Bottom Layer w0.381: P9.3@58.42,54.415 v1(58.42,55.88) P9.3@58.42,57.345
P1.05: P3.4 P9.4 P15.8 U1.AK22 | length 105
  Top Layer w0.152: P3.4@55.88,53.823 P3.4@55.88,54.415 ; v2(87.274,51.867) 87.401,51.74 87.401,35.103 87.427,35.077 v2(87.427,25.959)
  Top Layer w0.381: P3.4@55.88,54.415 v1(55.88,55.88) P3.4@55.88,57.345 P15.8@55.88,59.69
  Mid-Layer 1 w0.125: v2(87.427,25.959) 103.734,25.959 105.087,27.312 115.323,27.312 117.323,29.312 117.323,31.725 117.907,32.309 117.907,33.198 117.278,33.827 v2(117.278,34.589)
  Mid-Layer 1 w0.152: v1(55.88,55.88) 57.277,54.483 84.861,54.483 87.274,52.07 v2(87.274,51.867)
  Bottom Layer w0.381: P9.4@55.88,54.415 v1(55.88,55.88) P9.4@55.88,57.345
P1.06: P3.5 P9.5 P15.10 U1.AL21 | length 113.1
  Top Layer w0.125: U1.AL21@117.078,34.165 117.078,34.118 117.128,34.067 117.678,33.517 117.678,29.363 v2(118.948,28.092)
  Top Layer w0.152: P3.5@53.34,53.823 P3.5@53.34,54.415 ; v2(86.919,51.511) 87.122,51.308 87.122,34.976 87.071,34.925 v2(87.071,23.571)
  Top Layer w0.381: P3.5@53.34,54.415 v1(53.34,55.88) P3.5@53.34,57.345 P15.10@53.34,59.69
  Mid-Layer 1 w0.125: v2@87.071,23.571 87.605,23.571 103.835,23.571 105.773,25.509 116.365,25.509 v2(118.948,28.092)
  Mid-Layer 1 w0.152: v1(53.34,55.88) 55.016,54.204 84.734,54.204 86.919,52.019 v2(86.919,51.511)
  Bottom Layer w0.381: P9.5@53.34,54.415 v1(53.34,55.88) P9.5@53.34,57.345
P1.07: P3.6 P9.6 P15.12 U1.AK24 | length 110.3
  Top Layer w0.152: v2(86.563,51.156) 86.843,50.876 86.843,35.128 86.716,35.001 v2(86.716,25.603)
  Top Layer w0.381: P3.6@50.8,54.415 v1(50.8,55.88) P3.6@50.8,57.345 P15.12@50.8,59.69
  Mid-Layer 1 w0.125: v2(86.716,25.603) 103.734,25.603 105.185,27.055 115.421,27.055 117.577,29.21 117.577,31.623 118.161,32.207 118.161,33.274 117.678,33.757 v2(117.678,34.589)
  Mid-Layer 1 w0.152: v1(50.8,55.88) 52.756,53.924 84.607,53.924 86.563,51.968 v2(86.563,51.156)
  Bottom Layer w0.381: P9.6@50.8,54.415 v1(50.8,55.88) P9.6@50.8,57.345
P1.08: P3.7 P9.7 P15.14 U1.AL23 | length 117.1
  Top Layer w0.125: U1.AL23@117.478,34.189 117.478,34.071 117.953,33.596 117.953,29.571 v2(118.948,28.575)
  Top Layer w0.152: P3.7@48.26,53.823 P3.7@48.26,54.415 ; v2(86.208,50.8) 86.563,50.444 86.563,35.255 86.36,35.052 v2(86.36,24.536)
  Top Layer w0.381: P3.7@48.26,54.415 v1(48.26,55.88) P3.7@48.26,57.345 P15.14@48.26,59.69
  Mid-Layer 1 w0.125: v2@86.309,24.536 v2(86.36,24.536) 89.637,24.536 90.322,23.851 103.759,23.851 105.675,25.766 116.14,25.766 v2(118.948,28.575)
  Mid-Layer 1 w0.152: v1(48.26,55.88) 50.521,53.619 84.506,53.619 86.208,51.918 v2(86.208,50.8)
  Bottom Layer w0.381: P9.7@48.26,54.415 v1(48.26,55.88) P9.7@48.26,57.345
P1.09: P3.8 P9.8 P15.16 U1.AK26 | length 116.6
  Top Layer w0.152: v2(85.852,50.444) 86.284,50.013 86.284,35.433 86.004,35.154 v2(86.004,25.248)
  Top Layer w0.381: P3.8@45.72,54.415 v1(45.72,55.88) P3.8@45.72,57.345 P15.16@45.72,59.69
  Mid-Layer 1 w0.125: v2@86.004,25.248 86.893,25.248 103.734,25.248 105.283,26.797 115.519,26.797 118.847,30.124 118.847,31.902 118.415,32.334 118.415,33.376 118.078,33.713 v2(118.078,34.589)
  Mid-Layer 1 w0.152: v1(45.72,55.88) 48.26,53.34 84.379,53.34 85.852,51.867 v2(85.852,50.444)
  Bottom Layer w0.381: P9.8@45.72,54.415 v1(45.72,55.88) P9.8@45.72,57.345
P1.10: P4.1 P10.1 P16.2 U1.R31 | length 135.6
  Top Layer w0.125: v2@71.476,51.486 71.476,48.235 71.247,48.006 71.247,40.513 71.831,39.929 71.831,26.822 72.644,26.01 v3(72.644,24.994) v3@72.644,24.917 ; U1.R31@119.278,37.589 119.303,37.589 120.515,36.376 122.133,36.376 125.654,32.855 125.654,29.134 v1(125.044,28.524)
  Top Layer w0.381: P4.1@41.656,54.415 P4.1@41.656,57.345 P16.2@41.656,59.69
  Mid-Layer 1 w0.125: v3(72.644,24.994) 72.72,24.917 85.192,24.917 87.274,22.835 103.911,22.835 106.07,24.994 117.043,24.994 v1(119.177,27.127)
  Mid-Layer 1 w0.152: v1(41.656,55.88) 46.025,51.511 v2@71.45,51.511
  Bottom Layer w0.125: v1(119.177,27.127) 119.38,27.33 123.85,27.33 v1(125.044,28.524)
  Bottom Layer w0.381: P10.1@41.656,54.415 v1(41.656,55.88) P10.1@41.656,57.345
  other v2: 71.476,51.511
P1.11: P4.2 P10.2 P16.4 U1.B20 | length 98.9
  Top Layer w0.152: P4.2@39.116,53.823 P4.2@39.116,54.415
  Top Layer w0.381: P4.2@39.116,54.415 v1(39.116,55.88) P4.2@39.116,57.345 P16.4@39.116,59.69
  Mid-Layer 1 w0.125: v1@115.976,50.013 v1(116.053,50.089) 116.053,49.53 115.824,49.301 115.824,48.616 115.545,48.336 115.545,45.949 115.824,45.669 115.824,44.425 116.878,43.371 v2(116.878,40.189)
  Mid-Layer 1 w0.152: v1(39.116,55.88) 43.84,51.156 78.867,51.156 79.934,50.089 v1(104.724,50.089)
  Mid-Layer 2 w0.152: v1(104.724,50.089) v1(116.053,50.089)
  Bottom Layer w0.381: P10.2@39.116,54.415 v1(39.116,55.88) P10.2@39.116,57.345
P1.12: P4.3 P10.3 P16.6 U1.B18 | length 100.7
  Top Layer w0.152: P4.3@36.576,53.823 P4.3@36.576,54.415
  Top Layer w0.381: P4.3@36.576,54.415 v1(36.576,55.88) P4.3@36.576,57.345 P16.6@36.576,59.69
  Mid-Layer 1 w0.125: v1(115.519,49.632) 115.519,48.717 115.265,48.463 115.265,45.796 115.57,45.491 115.57,44.323 116.615,43.278 116.615,40.449 ; v2(116.478,40.189) v2@116.478,40.311 ; v2@116.478,40.311 116.615,40.449 ; v2@116.478,40.312 116.615,40.449
  Mid-Layer 1 w0.152: v1(36.576,55.88) 41.605,50.851 78.74,50.851 79.959,49.632 v1(104.165,49.632)
  Mid-Layer 2 w0.152: v1(104.165,49.632) v1(115.519,49.632)
  Bottom Layer w0.381: P10.3@36.576,54.415 v1(36.576,55.88) P10.3@36.576,57.345
P1.13: P4.4 P5.4 P10.4 P11.4 P16.8 U1.A17 | length 124.5
  Top Layer w0.152: v1(66.777,34.239) 66.777,33.363 P5.4@67.119,33.02 68.428,33.02 70.688,35.281 70.688,39.421 70.206,39.903 70.206,50.292 v2(70.002,50.495)
  Top Layer w0.381: P4.4@34.036,54.415 v1(34.036,55.88) P4.4@34.036,57.345 P16.8@34.036,59.69
  Mid-Layer 1 w0.125: v1(114.986,49.174) 114.986,45.72 115.291,45.415 115.291,44.221 116.278,43.234 v2(116.278,40.589)
  Mid-Layer 1 w0.152: v1(34.036,55.88) 39.421,50.495 v2(70.002,50.495) 78.613,50.495 79.934,49.174 v1(104.724,49.174)
  Mid-Layer 2 w0.152: v1(104.724,49.174) v1(114.986,49.174)
  Bottom Layer w0.152: v1(66.777,34.239) 66.777,33.198 66.954,33.02 P11.4@67.722,33.02
  Bottom Layer w0.381: P10.4@34.036,54.415 v1(34.036,55.88) P10.4@34.036,57.345
P1.14: P4.5 P5.1 P10.5 P11.1 P16.10 U1.B16 | length 121
  Top Layer w0.152: P5.1@62.674,35.56 62.992,35.878 v1(62.992,36.754) v2(62.992,50.14)
  Top Layer w0.381: P4.5@31.496,54.415 v1(31.496,55.88) P4.5@31.496,57.345 P16.10@31.496,59.69
  Mid-Layer 1 w0.125: v1(114.452,48.717) 114.732,48.438 114.732,45.618 115.037,45.314 115.037,44.094 115.928,43.203 115.928,40.439 ; v2(116.078,40.189) v2@116.078,40.289 ; 115.928,40.439 v2@116.078,40.289 ; 115.928,40.439 v2@116.078,40.289
  Mid-Layer 1 w0.152: v1(31.496,55.88) 37.236,50.14 v2(62.992,50.14) 78.537,50.14 79.959,48.717 v1(104.165,48.717)
  Mid-Layer 2 w0.152: v1(104.165,48.717) v1(114.452,48.717)
  Bottom Layer w0.152: P11.1@61.473,35.56 62.992,35.56 v1(62.992,36.754)
  Bottom Layer w0.381: P10.5@31.496,54.415 v1(31.496,55.88) P10.5@31.496,57.345
P1.15: P4.6 P5.3 P10.6 P11.3 P16.12 U1.B14 | length 126.7
  Top Layer w0.152: P5.3@62.674,33.02 63.932,33.02 64.821,33.909 64.821,36.373 63.348,37.846 v2(63.348,49.759)
  Top Layer w0.381: P4.6@28.956,54.415 P4.6@28.956,57.345 P16.12@28.956,59.69 ; P5.3@62.674,33.02 v1(62.674,34.023)
  Mid-Layer 1 w0.125: v1(113.919,48.26) 114.478,47.701 114.478,45.517 114.783,45.212 114.783,43.993 115.678,43.098 v2@115.678,40.214
  Mid-Layer 1 w0.152: v1(28.956,55.88) 35.077,49.759 v2(63.348,49.759) 78.461,49.759 79.959,48.26 v1(104.724,48.26)
  Mid-Layer 2 w0.125: v1(104.724,48.26) v1(113.919,48.26)
  Bottom Layer w0.381: P10.6@28.956,54.415 P10.6@28.956,57.345 ; P11.3@62.072,33.02 62.636,33.02 62.674,33.058 v1(62.674,34.023)
  other v2: 115.678,40.189
R\E\S\E\T\: P18.10 P25.10 SB42.2 SB44.2 SB45.2 SB56.1 U1.AC31 | length 127
  Top Layer w0.125: U1.AC31@119.29,36.001 119.914,35.376 121.719,35.376 123.825,33.27 123.825,30.15 v1(123.622,29.947)
  Top Layer w0.152: SB56.1@61.138,22.233 v2(61.138,26.365) ; v2(77.953,26.365) 77.953,22.758 78.595,22.116 78.595,21.384 SB45.2@78.595,21.031 78.744,21.18 ; 78.595,20.678 78.595,20.08 SB44.2@78.595,19.727 78.595,19.374 78.595,18.474 SB42.2@78.646,18.423 ; P25.10@80.01,34.245 80.213,34.042 v2(80.213,31.471) 80.213,30.505 80.747,29.972 v3(80.747,26.365) ; P18.10@98.984,61.056 98.984,60.223 102.387,56.82 102.387,51.003 102.946,50.444 102.946,40.919 103.657,40.208 103.657,37.77 104.242,37.186 ; v1(104.267,29.058) v2(104.267,31.471) 104.267,37.186
  Mid-Layer 1 w0.152: v2(61.138,26.365) v2(77.953,26.365) v3(80.747,26.365) ; v2(80.213,31.471) v2@104.242,31.471
  Bottom Layer w0.152: v1@104.267,29.102 122.777,29.102 v1(123.622,29.947)
RF: C21.2 J1.1 L1.2 | length 4.5
  Top Layer w0.762: 121.793,38.389 126.261,38.389 J1.1@126.263,38.391
SWD0_CLK: R15.1 U2.B18 | length 4.8
  Top Layer w0.152: v3(43.917,36.855) R15.1@43.917,37.231
  Mid-Layer 1 w0.125: v3(43.917,36.855) 43.917,36.383 44.413,35.886 44.413,33.486 44.714,33.186 44.716,33.186 44.914,32.988 44.914,32.986 44.976,32.923 v2(44.976,32.848)
SWD0_IO: R14.1 U2.B16 | length 4.9
  Top Layer w0.152: v3(43.358,36.855) R14.1@43.358,37.231
  Mid-Layer 1 w0.125: v3(43.358,36.855) 43.358,36.341 44.163,35.536 44.163,33.338 44.514,32.988 44.514,32.911 v2(44.576,32.848)
SWD0_RESET: R17.1 U2.B22 | length 4.8
  Top Layer w0.152: v3(45.034,36.855) R17.1@45.034,37.231
  Mid-Layer 1 w0.125: v3(45.034,36.855) 45.034,36.331 44.913,36.211 44.913,33.788 45.714,32.988 45.714,32.936 45.776,32.873 v2(45.776,32.848)
SWD0_RESET': P19.10 R17.2 | length 58.8
  Top Layer w0.152: P19.10@1.936,61.316 v1(3.505,61.316) ; R17.2@45.034,37.801 v1(45.034,39.192)
  Bottom Layer w0.152: v1(3.505,61.316) 3.505,59.462 5.944,57.023 8.289,57.023 15.477,49.835 39.471,49.835 40.208,49.097 40.208,42.189 43.205,39.192 v1(45.034,39.192)
SWD0_SEL: P19.3 U2.B24 | length 58.4
  Top Layer w0.152: P19.3@5.836,57.506 v1(7.366,57.506)
  Mid-Layer 1 w0.125: v1(45.593,36.316) 45.163,35.886 45.163,33.938 46.114,32.988 46.114,32.911 v2(46.176,32.848)
  Bottom Layer w0.125: v1(7.366,57.506) 8.357,57.506 15.723,50.14 39.599,50.14 40.538,49.2 40.538,42.316 43.205,39.649 45.237,39.649 45.593,39.294 v1(45.593,36.316)
SWD0_SWDCLK: P19.4 R15.2 | length 53.6
  Top Layer w0.152: P19.4@1.936,57.506 v1(3.505,57.506) ; R15.2@43.917,37.801 v1(43.917,38.227)
  Bottom Layer w0.152: v1(3.505,57.506) 4.572,56.439 8.011,56.439 15.224,49.225 37.667,49.225 38.176,48.716 38.176,43.205 43.155,38.227 v1(43.917,38.227)
SWD0_SWDIO: P19.2 R14.2 | length 52.4
  Top Layer w0.152: P19.2@1.936,56.236 v1(3.505,56.236) ; v1(42.932,37.801) R14.2@43.358,37.801
  Bottom Layer w0.152: v1(3.505,56.236) 3.581,56.159 7.859,56.159 15.098,48.92 37.541,48.92 37.871,48.59 37.871,42.861 v1(42.932,37.801)
SWD0_SWO: R16.1 U2.B20 | length 4.8
  Top Layer w0.152: v3(44.475,36.855) R16.1@44.475,37.231
  Mid-Layer 1 w0.125: v3(44.475,36.855) 44.475,36.424 44.663,36.236 44.663,33.638 45.314,32.988 45.314,32.936 45.376,32.873 v2(45.376,32.848)
SWD0_SWO': P19.6 R16.2 | length 55.8
  Top Layer w0.152: P19.6@1.936,58.776 v1(3.505,58.776) ; R16.2@44.475,37.801 v1(44.475,38.71)
  Bottom Layer w0.152: v1(3.505,58.776) 5.562,56.718 8.162,56.718 15.351,49.53 39.345,49.53 39.903,48.971 39.903,42.037 43.231,38.71 v1(44.475,38.71)
SWD1_CLK: R21.1 U2.AK28 | length 8.8
  Top Layer w0.125: v3@54.398,26.086 R21.1@54.398,26.918
  Mid-Layer 1 w0.125: v2(46.976,27.248) 46.976,27.201 47.038,27.138 47.038,27.108 48.061,26.086 v3(54.407,26.086)
SWD1_IO: R19.1 U2.AK30 | length 7.2
  Top Layer w0.125: v3(53.797,26.441) R19.1@53.797,26.918
  Mid-Layer 1 w0.125: v2(47.376,27.248) 48.183,26.441 50.418,26.441 v3(53.797,26.441)
SWD1_RESET: R23.1 U2.AK24 | length 11.8
  Top Layer w0.125: v3(55.601,25.375) R23.1@55.601,26.918
  Mid-Layer 1 w0.125: v2(46.176,27.248) 46.209,27.215 46.209,27.086 47.921,25.375 v3(55.601,25.375)
SWD1_SEL: Q2.3 U2.AK22 | length 4.9
  Top Layer w0.152: v3(49.688,26.944) 50.22,26.944 Q2.3@50.228,26.936
  Mid-Layer 1 w0.125: v2(45.776,27.248) 45.776,27.296 45.838,27.358 45.838,27.388 46.036,27.586 47.516,27.586 48.158,26.944 v3(49.688,26.944)
SWD1_SWO: R22.1 U2.AK26 | length 10.3
  Top Layer w0.125: v3@54.999,25.73 R22.1@54.999,26.918
  Mid-Layer 1 w0.125: v2(46.576,27.248) 46.576,27.171 48.017,25.73 v3(54.991,25.73)
SWD3_CLK: TP6.1 U2.R1 U5.3 | length 42.9
  Top Layer w0.125: v3(36.957,22.885) 36.957,28.473 39.307,30.823 40.597,30.823 41.172,30.248 U2.R1@41.376,30.248
  Top Layer w0.152: U5.3@62.572,19.291 v1(63.36,19.291)
  Mid-Layer 1 w0.152: v3@36.957,22.891 v1(62.758,22.891)
  Bottom Layer w0.152: TP6.1@62.758,24.144 v1(62.758,22.891) 63.36,22.289 v1(63.36,19.291)
SWD3_IO: TP5.1 U2.N1 U5.15 | length 44.2
  Top Layer w0.125: v3(36.601,18.923) 36.601,28.524 39.15,31.073 40.701,31.073 41.126,30.648 U2.N1@41.376,30.648
  Top Layer w0.152: v1(57.658,16.84) 58.674,15.824 61.697,15.824 62.078,16.205 62.078,17.015 61.947,17.145 U5.15@61.947,17.866
  Mid-Layer 1 w0.152: v3(36.601,18.923) 55.575,18.923 v1(57.658,16.84)
SWD3_RESET: TP7.1 U2.AA1 U5.7 | length 38.6
  Top Layer w0.125: v3(39.446,20.168) 39.446,25.679 39.167,25.959 39.167,28.727 39.775,29.336 40.888,29.336 41.176,29.048 U2.AA1@41.376,29.048
  Top Layer w0.152: U5.7@61.547,20.316 61.547,19.885 v3(61.697,19.736)
  Mid-Layer 1 w0.152: v3(39.446,20.168) 57.76,20.168 57.963,20.168 58.09,20.168 58.318,20.396 59.504,20.396 v1(59.758,20.142) 61.29,20.142 v3(61.697,19.736)
  Bottom Layer w0.152: v1(59.758,20.142) TP7.1@59.758,24.206
SWD3_SWO: TP8.1 U2.W1 U5.11 | length 39.4
  Top Layer w0.125: v3(39.091,19.812) 39.091,25.4 38.811,25.679 38.811,28.804 39.593,29.586 40.992,29.586 41.13,29.448 U2.W1@41.376,29.448
  Top Layer w0.152: v1(58.598,19.812) 59.055,19.355 59.995,19.355 60.458,18.891 U5.11@60.922,18.891
  Mid-Layer 1 w0.152: v3(39.091,19.812) v1(58.598,19.812)
  Bottom Layer w0.152: TP8.1@56.758,24.206 58.598,22.366 v1(58.598,19.812)
SWDCLK: P18.4 P25.4 SB55.1 U1.W31 | length 125.5
  Top Layer w0.125: U1.W31@119.29,36.801 120.214,35.876 121.926,35.876 124.739,33.063 124.739,29.642 v1(124.333,29.235)
  Top Layer w0.152: SB55.1@64.625,19.71 v2@64.625,26.01 ; v2@83.82,26.772 v2(83.82,28.854) P25.4@83.82,34.245 ; P18.4@95.174,61.056 95.174,60.198 95.961,59.411 99.339,59.411 102.108,56.642 102.108,50.876 102.667,50.317 102.667,40.767 103.346,40.088 103.346,37.675 103.911,37.109 103.911,32.131 103.835,32.055 v2(103.835,30.759) 103.759,30.683 103.759,28.499 v1(103.302,28.042)
  Mid-Layer 1 w0.152: v2(64.618,26.01) 80.924,26.01 81.636,26.721 v2(83.82,26.721) ; v2(83.82,28.854) 98.984,28.854 100.889,30.759 v2(103.835,30.759) v2@103.911,30.759
  Bottom Layer w0.152: v1(103.302,28.042) 103.537,28.277 123.374,28.277 v1(124.333,29.235)
SWDIO: P18.2 P25.2 SB54.1 U1.AA31 | length 128.9
  Top Layer w0.125: 122.703,34.746 121.822,35.626 ; v1(123.622,29.235) 124.282,29.896 124.282,33.166 121.822,35.626 ; 120.064,35.626 119.29,36.401 120.064,35.626 ; 120.064,35.626 121.822,35.626 ; 120.064,35.626 121.822,35.626
  Top Layer w0.152: SB54.1@64.625,17.856 64.625,18.6 65.151,19.126 v2(65.151,26.721) ; v2@85.09,27.127 v2(85.09,31.115) P25.2@85.09,34.245 ; P18.2@93.904,61.056 93.904,60.223 95.072,59.055 99.289,59.055 101.829,56.515 101.829,50.749 102.387,50.19 102.387,40.615 103.035,39.967 103.035,37.579 103.556,37.059 103.556,32.182 103.48,32.106 v2(103.48,31.115) 103.48,29.185 103.302,29.007 v1(103.302,28.753)
  Mid-Layer 1 w0.152: v2(65.151,26.721) 80.264,26.721 80.62,27.076 v2(85.09,27.076) ; v2(85.09,31.115) v2(103.48,31.115)
  Bottom Layer w0.152: v1(103.302,28.753) 103.48,28.575 104.889,28.575 105.004,28.689 123.076,28.689 v1(123.622,29.235)
U\A\R\T\1\_\F\C\_\O\F\F\: SW7.5 U25.2 | length 32.7
  Top Layer w0.152: SW7.5@52.321,21.26 v3(53.035,21.26) ; v3(82.804,19.152) 83.064,18.891 U25.2@83.629,18.891
  Mid-Layer 1 w0.152: v3(53.035,21.26) 53.518,20.777 61.239,20.777 61.443,20.574 72.822,20.574 73.177,20.218 77.191,20.218 77.724,20.752 81.204,20.752 v3(82.804,19.152)
U\A\R\T\2\_\F\C\_\O\F\F\: SW7.2 U3.2 | length 20.9
  Top Layer w0.125: SW7.2@52.321,17.56 52.324,17.557 v3(52.324,16.535) ; U3.2@69.591,18.891 70.047,18.891 v3(70.098,18.942)
  Mid-Layer 1 w0.125: v3(52.324,16.535) 52.934,15.926 62.687,15.926 63.805,17.043 66.446,17.043 68.478,19.075 69.964,19.075 v3(70.098,18.942)